# Altium PCB MC0202_V0.90.pcbdoc (part 2 of 3)
Units mm, origin at the board's own origin, x right, y up, seen from the top; angles counter-clockwise.
Board outline 121 x 80 mm, 4 copper layers (Top Layer, Mid-Layer 1, Mid-Layer 2, Bottom Layer); 203 components, 207 nets, 836 pads, 317 vias.
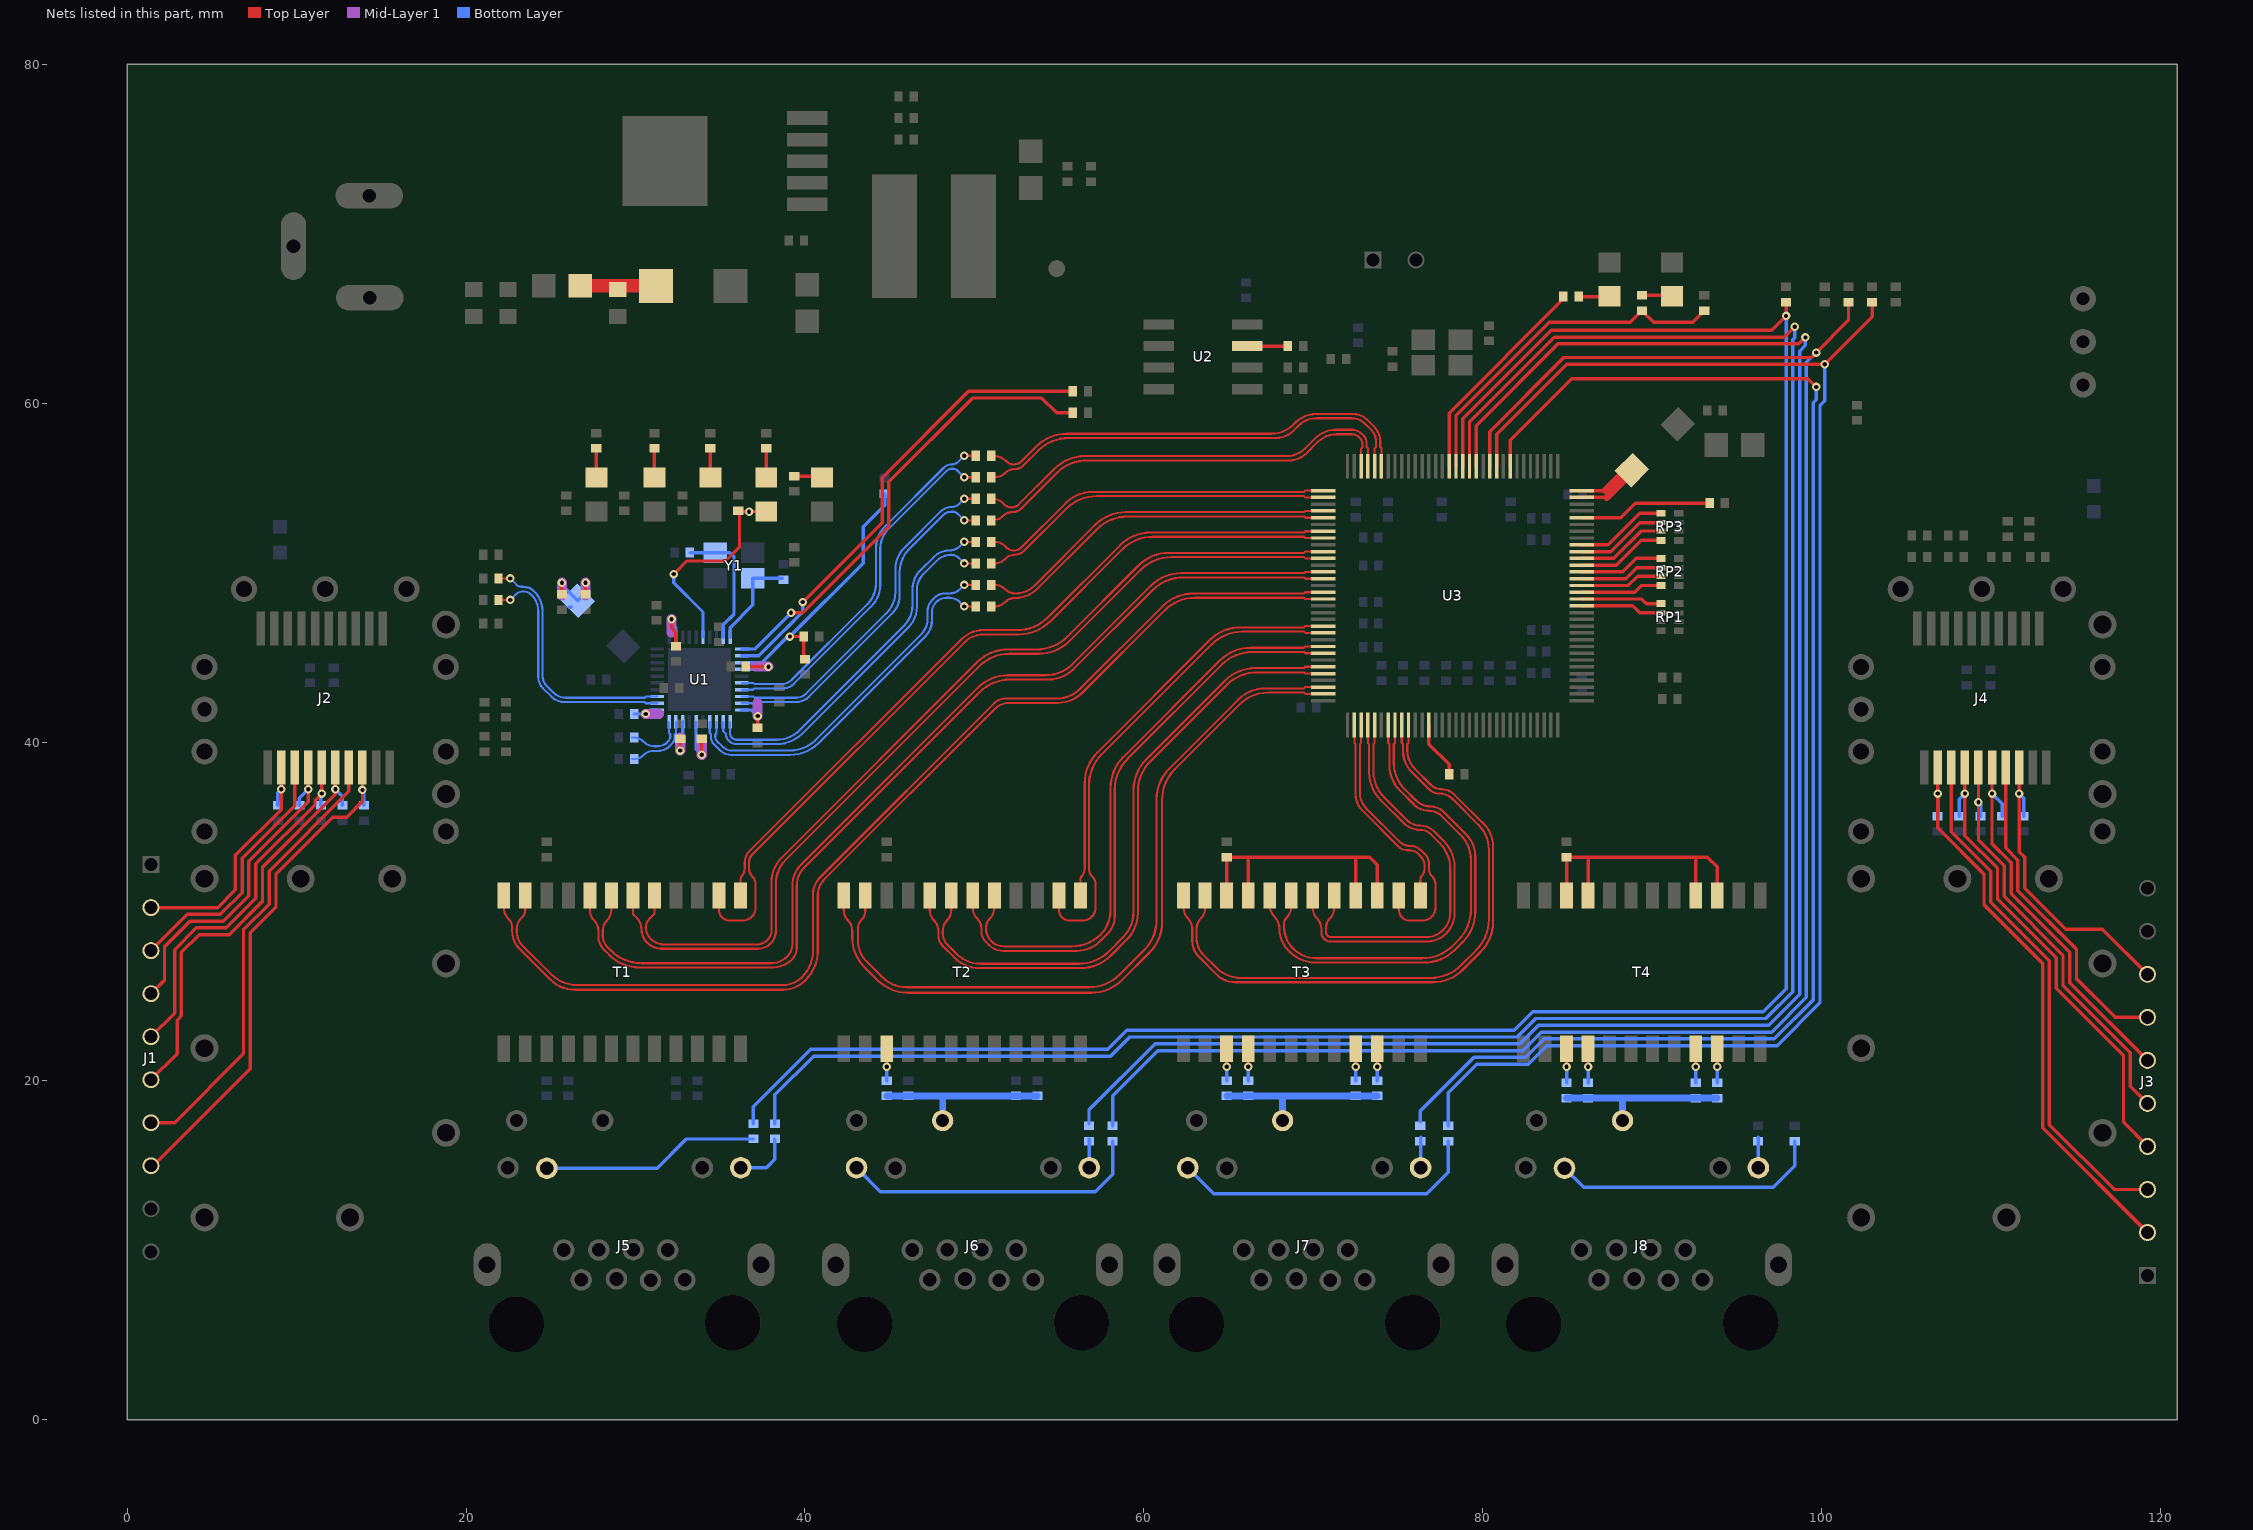
[diagram p4: the nets of this part, all layers, seen from the top]

## Via types
v1: diameter 0.5, hole 0.25, Top Layer to Bottom Layer, 313 vias
v2: diameter 2, hole 1.9, Top Layer to Bottom Layer, 4 vias

## Nets (pads, with @x,y where several pads share a name; then routed paths per layer and width w, separated by ;. In a path a pad name is that pad's centre, name@x,y a point inside that pad or via, vN(x,y) a via of type N, cw(c..) or ccw(c..) an arc to the next point about the centre after c; other vN are vias at no path point) (continued)
N15575: R67.2 T2.15 | length 1.9
  Top Layer w0.2: v1(44.831,20.828) T2.15@44.831,21.891
  Bottom Layer w0.2: R67.2@44.831,20.008 v1(44.831,20.828)
N15683: C69.1 R64.1 R65.1 R66.1 R67.1 | length 10.3
  Bottom Layer w0.4: R67.1@44.831,19.108 48.133,19.108 ; C69.1@48.133,17.653 48.133,19.108 ; R64.1@53.721,19.108 48.133,19.108
N16243: C71.1 T3.3 T3.4 T3.9 T3.10 | length 17.7
  Top Layer w0.2: T3.10@64.897,30.941 C71.1@64.897,33.205 66.167,33.205 ; T3.9@66.167,30.941 66.167,33.205 ; T3.4@72.517,30.941 72.517,33.205 ; T3.3@73.787,30.941 73.787,32.766 73.348,33.205 72.517,33.205 ; 66.167,33.205 72.517,33.205
N16251: R72.2 T3.22 | length 1.9
  Top Layer w0.2: v1(73.787,20.828) T3.22@73.787,21.891
  Bottom Layer w0.2: R72.2@73.787,20.008 v1(73.787,20.828)
N16307: C72.1 T4.3 T4.4 T4.9 T4.10 | length 17.6
  Top Layer w0.2: T4.10@84.963,30.941 C72.1@84.963,33.205 86.233,33.205 ; T4.9@86.233,30.941 86.233,33.205 ; T4.4@92.583,30.941 92.583,33.205 ; T4.3@93.853,30.941 93.853,32.628 93.276,33.205 92.583,33.205 ; 86.233,33.205 92.583,33.205
N16315: R76.2 T4.22 | length 2
  Top Layer w0.2: v1(93.853,20.828) T4.22@93.853,21.891
  Bottom Layer w0.2: R76.2@93.853,19.881 v1(93.853,20.828)
N16467: R73.2 T3.21 | length 1.9
  Top Layer w0.2: v1(72.517,20.828) T3.21@72.517,21.891
  Bottom Layer w0.2: R73.2@72.517,20.008 v1(72.517,20.828)
N16497: R77.2 T4.21 | length 2
  Top Layer w0.2: v1(92.583,20.828) T4.21@92.583,21.891
  Bottom Layer w0.2: R77.2@92.583,19.881 v1(92.583,20.828)
N16623: R74.2 T3.16 | length 1.9
  Top Layer w0.2: v1(66.167,20.828) T3.16@66.167,21.891
  Bottom Layer w0.2: R74.2@66.167,20.008 v1(66.167,20.828)
N16653: R78.2 T4.16 | length 2
  Top Layer w0.2: v1(86.233,20.828) T4.16@86.233,21.891
  Bottom Layer w0.2: R78.2@86.233,19.881 v1(86.233,20.828)
N16787: R75.2 T3.15 | length 1.9
  Top Layer w0.2: v1(64.897,20.828) T3.15@64.897,21.891
  Bottom Layer w0.2: R75.2@64.897,20.008 v1(64.897,20.828)
N16811: R79.2 T4.15 | length 2
  Top Layer w0.2: v1(84.963,20.828) T4.15@84.963,21.891
  Bottom Layer w0.2: R79.2@84.963,19.881 v1(84.963,20.828)
N17015: C73.1 R72.1 R73.1 R74.1 R75.1 | length 10.3
  Bottom Layer w0.4: R75.1@64.897,19.108 68.199,19.108 ; C73.1@68.199,17.653 68.199,19.108 ; R72.1@73.787,19.108 68.199,19.108
N20626: J1.2 J2.2 R46.1 | length 14.8
  Top Layer w0.2: J1.2@1.397,30.226 5.334,30.226 6.382,31.274 6.382,33.306 9.084,36.008 v1(9.084,37.211) J2.2@9.084,38.492
  Bottom Layer w0.2: R46.1@8.89,36.264 8.89,37.017 v1(9.084,37.211)
N20630: J1.3 J2.3 | length 15.5
  Top Layer w0.2: J1.3@1.397,27.686 3.537,29.826 5.5,29.826 6.782,31.108 6.782,33.14 9.884,36.242 J2.3@9.884,38.492
N20636: J1.4 J2.4 R47.1 | length 19.5
  Top Layer w0.2: J1.4@1.397,25.146 2.197,25.946 2.197,27.92 3.703,29.426 5.677,29.426 7.182,30.931 7.182,32.975 10.684,36.477 v1(10.684,37.211) J2.4@10.684,38.492
  Bottom Layer w0.2: R47.1@10.16,36.264 10.16,36.687 v1(10.684,37.211)
N20642: J1.5 J2.5 R48.1 | length 22
  Top Layer w0.2: J1.5@1.397,22.606 2.794,24.003 2.794,27.744 4.076,29.026 5.843,29.026 7.582,30.765 7.582,32.809 11.084,36.311 11.084,36.557 v1(11.484,36.957) J2.5@11.484,38.492
  Bottom Layer w0.2: R48.1@11.43,36.264 11.43,36.903 v1(11.484,36.957) ; v1@11.43,36.957 v1@11.43,37.157
N20648: J1.6 J2.6 R49.1 | length 25.1
  Top Layer w0.2: J1.6@1.397,20.066 2.94,21.609 2.94,23.583 3.194,23.837 3.194,27.578 4.242,28.626 6.008,28.626 7.982,30.6 7.982,32.62 12.284,36.922 v1(12.284,37.211) J2.6@12.284,38.492
  Bottom Layer w0.2: v1(12.284,37.211) 12.7,36.795 R49.1@12.7,36.264
N20654: J1.7 J2.7 | length 26.6
  Top Layer w0.2: J1.7@1.397,17.526 2.794,17.526 6.858,21.59 6.858,28.91 8.382,30.434 8.382,32.385 13.084,37.087 J2.7@13.084,38.492
N20660: J1.8 J2.8 R50.1 | length 30.1
  Top Layer w0.2: J1.8@1.397,14.986 1.524,14.986 7.258,20.72 7.258,28.744 8.782,30.268 8.782,32.219 12.123,35.56 12.954,35.56 13.884,36.49 v1(13.884,37.17) J2.8@13.884,38.492
  Bottom Layer w0.2: R50.1@13.97,36.264 v1@13.97,37.084
N22123: J3.2 J4.2 R51.1 | length 33.9
  Top Layer w0.2: J4.2@106.874,38.492 v1(106.874,36.96) 106.874,34.932 109.601,32.205 109.601,30.388 113.062,26.927 113.062,17.24 J3.2@119.253,11.049
  Bottom Layer w0.2: R51.1@106.861,35.629 106.874,35.642 v1(106.874,36.96)
N22131: J3.4 J4.4 R52.1 | length 28.3
  Top Layer w0.2: J4.4@108.474,38.492 v1(108.474,36.96) 108.474,34.463 110.401,32.536 110.401,30.719 113.862,27.258 113.862,25.469 117.837,21.494 117.837,17.545 J3.4@119.253,16.129
  Bottom Layer w0.2: R52.1@108.131,35.629 108.131,36.617 v1(108.474,36.96)
N22135: J3.5 J4.5 R53.1 | length 24.8
  Top Layer w0.2: J4.5@109.274,38.492 v1(109.274,36.449) 109.274,34.229 110.801,32.702 110.801,30.885 114.262,27.424 114.262,25.634 118.237,21.659 118.237,19.685 J3.5@119.253,18.669
  Bottom Layer w0.2: v1(109.274,36.449) 109.401,36.322 R53.1@109.401,35.629
N22139: J3.6 J4.6 R54.1 | length 22.7
  Top Layer w0.2: J4.6@110.074,38.492 v1(110.074,36.957) 110.074,33.994 111.201,32.867 111.201,31.051 114.662,27.59 114.662,25.8 J3.6@119.253,21.209
  Bottom Layer w0.2: v1(110.074,36.957) 110.671,36.36 R54.1@110.671,35.629
N22147: J3.8 J4.8 R55.1 | length 18
  Top Layer w0.2: J4.8@111.674,38.492 v1(111.674,36.957) 111.674,33.526 112.001,33.199 112.001,31.382 114.427,28.956 116.586,28.956 J3.8@119.253,26.289
  Bottom Layer w0.2: v1(111.674,36.957) 111.941,36.69 R55.1@111.941,35.629
N22159: J3.3 J4.3 | length 31
  Top Layer w0.2: J4.3@107.674,38.492 107.674,34.697 110.001,32.37 110.001,30.554 113.462,27.093 113.462,17.406 117.279,13.589 J3.3@119.253,13.589 J3.3@119.38,13.589
N22191: J3.7 J4.7 | length 19.5
  Top Layer w0.2: J4.7@110.874,38.492 110.874,33.76 111.601,33.033 111.601,31.216 115.062,27.755 115.062,26.035 117.348,23.749 J3.7@119.253,23.749 J3.7@119.38,23.749
N29901: RP1.5 U3.47 | length 4.8
  Top Layer w0.2: U3.47@85.862,48.041 88.853,48.041 89.273,47.621 RP1.5@90.534,47.621
N29903: RP1.7 U3.48 | length 4.8
  Top Layer w0.2: U3.48@85.862,48.441 89.408,48.441 89.678,48.171 RP1.7@90.534,48.171 RP1.7@90.518,48.187
N29949: RP2.1 U3.49 | length 4.8
  Top Layer w0.2: U3.49@85.862,48.841 88.973,48.841 89.37,49.238 RP2.1@90.534,49.238
N29951: RP2.3 U3.50 | length 4.9
  Top Layer w0.2: U3.50@85.862,49.241 88.611,49.241 89.158,49.788 RP2.3@90.534,49.788
N29953: RP2.5 U3.51 | length 4.9
  Top Layer w0.2: U3.51@85.862,49.641 87.122,49.641 88.445,49.641 89.092,50.288 RP2.5@90.534,50.288
N29955: RP2.7 U3.52 | length 5
  Top Layer w0.2: U3.52@85.862,50.041 88.268,50.041 89.065,50.838 RP2.7@90.534,50.838
N30001: RP3.1 U3.53 | length 5.3
  Top Layer w0.2: U3.53@85.862,50.441 87.398,50.441 ; 87.329,50.441 87.398,50.441 ; RP3.1@90.534,51.905 89.37,51.905 87.906,50.441 87.398,50.441
N30003: RP3.3 U3.54 | length 6.6
  Top Layer w0.2: 87.163,50.841 U3.54@85.862,50.841 87.74,50.841 89.354,52.455 RP3.3@90.534,52.455
N30005: RP3.5 U3.55 | length 5.4
  Top Layer w0.2: U3.55@85.862,51.241 87.575,51.241 89.289,52.955 RP3.5@90.534,52.955 RP3.5@90.53,52.959
N30007: RP3.7 U3.56 | length 5.4
  Top Layer w0.2: U3.56@85.862,51.641 87.409,51.641 89.273,53.505 RP3.7@90.534,53.505
N31601: R25.1 U3.60 | length 7.9
  Top Layer w0.2: U3.60@85.862,53.241 88.166,53.241 89.027,54.102 R25.1@93.403,54.102
N31674: L2.1 U3.63 U3.64 | length 7.1
  Top Layer w0.2: U3.63@85.862,54.441 87.334,54.441 ; U3.64@85.862,54.841 87.226,54.841 ; L2.1@88.439,56.054 L2.1@88.82,56.054 L2.1@88.82,55.673
  Top Layer w0.4: 87.226,54.841 L2.1@88.439,56.054 ; 87.334,54.441 L2.1@88.608,55.715
N33611: R16.2 U2.7 | length 2.4
  Top Layer w0.2: U2.7@66.1,63.373 R16.2@68.511,63.373
N33737: R19.1 U3.13 | length 3.4
  Top Layer w0.2: U3.13@76.832,41.011 76.832,39.881 78.036,38.677 R19.1@78.036,38.1
N34627: C74.1 R76.1 R77.1 R78.1 R79.1 | length 10.2
  Bottom Layer w0.4: R79.1@84.963,18.981 88.265,18.981 ; C74.1@88.265,17.653 88.265,18.981 ; R76.1@93.853,18.981 88.265,18.981
N45715: J6.12 R57.2 | length 18.1
  Bottom Layer w0.2: J6.12@43.046,14.872 44.456,13.462 57.15,13.462 58.166,14.478 R57.2@58.166,16.441
N45811: J7.12 R68.2 | length 18.4
  Bottom Layer w0.2: J7.12@62.604,14.872 64.141,13.335 76.708,13.335 77.978,14.605 R68.2@77.978,16.441
N47742: LD6.2 R20.1 | length 1.8
  Top Layer w0.2: R20.1@85.667,66.294 87.487,66.294 LD6.2@87.503,66.31
N47952: LD7.2 R21.1 | length 1.7
  Top Layer w0.2: R21.1@89.408,66.363 LD7.2@91.133,66.363
N048171: LD4.1 R9.2 | length 1.7
  Top Layer w0.2: LD4.1@37.719,55.61 R9.2@37.719,57.335
N48831: J5.11 R56.2 | length 12.9
  Bottom Layer w0.2: J5.11@24.768,14.841 31.281,14.841 33.009,16.568 R56.2@36.957,16.568
N48920: J5.9 R58.2 | length 3.4
  Bottom Layer w0.2: J5.9@36.211,14.872 37.732,14.872 38.227,15.367 R58.2@38.227,16.568
N049111: LD3.1 R6.2 | length 1.7
  Top Layer w0.2: LD3.1@34.417,55.61 R6.2@34.417,57.335
N049271: LD2.1 R4.2 | length 1.7
  Top Layer w0.2: LD2.1@31.115,55.61 R4.2@31.115,57.335
N50896: J6.9 R59.2 | length 1.7
  Bottom Layer w0.2: J6.9@56.785,14.872 R59.2@56.785,16.552
N51484: J7.9 R70.2 | length 1.8
  Bottom Layer w0.2: J7.9@76.343,14.872 R70.2@76.343,16.679
N51703: J8.11 R69.2 | length 16
  Bottom Layer w0.2: J8.11@84.839,14.841 85.963,13.716 97.155,13.716 98.425,14.986 R69.2@98.425,16.441
N51790: J8.9 R71.2 | length 1.8
  Bottom Layer w0.2: J8.9@96.282,14.872 R71.2@96.282,16.679
N052690: LD1.1 R1.2 | length 1.7
  Top Layer w0.2: LD1.1@27.686,55.61 R1.2@27.686,57.335
N053670: LD5.1 R12.2 | length 1.6
  Top Layer w0.2: R12.2@39.37,55.695 LD5.1@40.936,55.695
N88350: C82.1 D1.1 FB2.2 | length 4.5
  Top Layer w0.8: FB2.2@26.733,66.929 D1.1@31.201,66.929
P0_1V: C12.1 C13.1 C19.1 C20.1 C21.1 C22.1 C23.1 C24.1 L1.1 U1.6 U1.8 U1.11 U1.22 U1.34 U1.40 | length 25.3
  Top Layer w0.2: C12.1@25.654,48.71 v1(25.654,49.403) ; C13.1@27.051,48.71 v1(27.051,49.403) ; v1(32.131,47.244) 32.131,46.736 32.385,46.482 C22.1@32.385,45.662 ; v1(32.639,39.497) C20.1@32.639,40.19 ; v1(33.909,39.243) C19.1@33.909,40.19 ; C23.1@36.518,44.45 v1(37.846,44.45) ; C24.1@37.211,40.963 v1(37.211,41.529)
  Mid-Layer 1 w0.2: 25.654,48.768 v1(25.654,49.403)
  Mid-Layer 1 w0.6: 25.654,48.641 v1(25.654,49.403) ; 27.051,48.641 v1(27.051,49.403) ; v1(30.607,41.656) 31.369,41.656 ; 32.131,46.482 v1(32.131,47.244) ; v1(32.639,39.497) 32.639,40.259 ; v1(33.909,39.243) 33.909,40.005 ; 37.084,44.45 v1(37.846,44.45) ; v1(37.211,41.529) 37.211,42.291
  Bottom Layer w0.18: 33.582,39.57 U1.6@33.582,41.189
  Bottom Layer w0.2: v1(25.654,49.403) 25.654,49.276 L1.1@26.59,48.34 27.051,48.801 v1(27.051,49.403) ; L1.1@26.082,47.959 L1.1@26.209,47.959 ; C21.1@29.914,41.656 v1(30.607,41.656) 30.839,41.888 U1.11@31.283,41.888 ; v1(32.131,47.244) 32.131,46.99 32.382,46.739 U1.22@32.382,46.187 ; v1(32.639,39.497) 32.672,39.53 32.672,40.186 32.782,40.296 U1.8@32.782,41.189 ; 33.582,39.57 v1(33.909,39.243) ; U1.40@36.281,41.888 36.852,41.888 v1(37.211,41.529) ; U1.34@36.281,44.288 37.684,44.288 v1(37.846,44.45)
P0_AN: C6.1 U1.37 | length 21.3
  Top Layer w0.127: v1(49.403,55.626) C6.1@50.096,55.626
  Bottom Layer w0.127: U1.37@36.281,43.088 36.935,43.088 37.008,43.161 38.689,43.161 ccw(c38.689,44.093) 39.348,43.434 43.92,48.006 ; 43.921,48.007 ccw(c42.641,49.285) 44.45,49.285 44.45,51.435 cw(c46.036,51.435) 44.914,52.556 ; 44.914,52.556 48.35,55.992 cw(c48.694,55.648) 48.694,56.134 cw(c48.694,55.648) 49.037,55.992 v1(49.403,55.626)
P0_AP: C3.1 U1.36 | length 21.3
  Top Layer w0.127: v1(49.403,56.896) C3.1@50.096,56.896
  Bottom Layer w0.127: U1.36@36.281,43.488 36.96,43.488 37.033,43.415 38.584,43.415 ccw(c38.584,44.347) 39.243,43.688 43.688,48.133 ; 43.689,48.134 ccw(c42.462,49.359) 44.196,49.359 44.196,51.435 cw(c46.036,51.435) 44.735,52.736 48.207,56.208 cw(c48.641,55.775) 48.641,56.388 ccw(c48.641,57.001) 49.075,56.568 v1(49.403,56.896)
P0_BN: C4.1 U1.39 | length 20.1
  Top Layer w0.127: v1(49.403,53.086) C4.1@50.096,53.086
  Bottom Layer w0.127: U1.39@36.281,42.288 36.935,42.288 37.008,42.361 39.497,42.361 ccw(c39.497,43.397) 40.229,42.664 45.159,47.594 ccw(c44.113,48.641) 45.593,48.641 45.593,50.038 cw(c47.485,50.038) 46.146,51.375 ; 46.147,51.376 48.178,53.407 cw(c48.63,52.954) 48.63,53.594 48.715,53.594 cw(c48.715,53.16) 49.022,53.467 v1(49.403,53.086)
P0_BP: C7.1 U1.38 | length 20.1
  Top Layer w0.127: v1(49.403,54.356) C7.1@50.096,54.356
  Bottom Layer w0.127: U1.38@36.281,42.688 36.96,42.688 37.033,42.615 39.497,42.615 ccw(c39.497,43.397) 40.05,42.844 44.831,47.625 ccw(c43.605,48.851) 45.339,48.851 45.339,50.165 cw(c47.179,50.165) 45.878,51.466 48.026,53.614 cw(c48.641,53) 48.451,53.848 cw(c48.641,53) 48.641,53.869 ccw(c48.641,54.533) 49.11,54.063 v1(49.403,54.356)
P0_CN: C9.1 U1.2 | length 21.7
  Top Layer w0.127: v1(49.403,50.546) C9.1@50.096,50.546
  Bottom Layer w0.127: U1.2@35.182,41.189 35.182,40.637 35.328,40.491 ccw(c35.889,40.491) 35.492,40.095 ; 35.492,40.094 35.544,40.042 ; 35.546,40.041 ccw(c35.941,40.439) 35.941,39.878 38.354,39.878 ccw(c38.354,41.972) 39.834,40.491 46.101,46.758 ccw(c44.875,47.984) 46.609,47.984 46.609,48.991 cw(c47.91,48.991) 46.99,49.911 47.774,50.695 ; 47.774,50.695 cw(c48.641,49.828) 48.641,51.054 cw(c48.641,50.441) 49.075,50.874 v1(49.403,50.546)
P0_CP: C8.1 U1.1 | length 21.3
  Top Layer w0.127: v1(49.403,51.816) C8.1@50.096,51.816
  Bottom Layer w0.127: U1.1@35.582,41.189 35.582,40.513 ccw(c35.942,40.513) 35.688,40.258 ccw(c35.993,40.563) 35.993,40.132 38.354,40.132 ccw(c38.354,41.972) 39.655,40.671 45.847,46.863 ccw(c44.621,48.089) 46.355,48.089 46.355,49.042 cw(c47.858,49.042) 46.633,49.914 cw(c47.858,49.042) 46.795,50.105 47.634,50.943 cw(c48.514,50.063) 47.809,51.089 cw(c48.514,50.063) 48.514,51.308 ccw(c48.514,52.228) 49.164,51.577 v1(49.403,51.816)
P0_DN: C11.1 U1.4 | length 21.7
  Top Layer w0.127: v1(49.403,48.006) C11.1@50.096,48.006
  Bottom Layer w0.127: U1.4@34.382,41.189 34.382,40.535 34.455,40.462 34.455,40.259 ccw(c34.964,40.259) 34.604,39.899 35.006,39.497 ccw(c35.619,40.11) 35.619,39.243 39.116,39.243 ccw(c39.116,41.643) 40.813,39.946 ; 40.813,39.946 47.117,46.25 ccw(c46.197,47.17) 47.498,47.17 47.498,47.647 cw(c48.365,47.647) 47.751,48.259 cw(c48.365,47.647) 48.365,48.514 48.536,48.514 cw(c48.536,47.647) 49.148,48.261 v1(49.403,48.006)
P0_DP: C10.1 U1.3 | length 21.3
  Top Layer w0.127: v1(49.403,49.276) C10.1@50.096,49.276
  Bottom Layer w0.127: U1.3@34.782,41.189 34.782,40.51 34.709,40.437 34.709,40.295 ccw(c35.051,40.295) 34.809,40.053 35.111,39.751 ccw(c35.724,40.364) 35.113,39.75 ccw(c35.724,40.364) 35.724,39.497 39.116,39.497 ccw(c39.116,41.643) 40.633,40.125 ; 40.634,40.126 46.863,46.355 ccw(c45.943,47.275) 47.244,47.275 47.244,47.752 cw(c48.111,47.752) 47.497,48.365 ; 47.498,48.365 47.647,48.514 ; 47.647,48.515 cw(c48.26,47.901) 48.26,48.768 48.536,48.768 ccw(c48.536,49.635) 49.148,49.021 v1(49.403,49.276)
P0_HSIN: C65.2 U1.13 | length 14.9
  Top Layer w0.127: C65.2@21.913,49.657 v1(22.606,49.657)
  Bottom Layer w0.127: v1(22.606,49.657) 22.987,49.276 ccw(c23.243,49.532) 23.243,49.17 cw(c23.243,47.928) 23.47,49.149 cw(c23.243,47.928) 23.533,49.136 cw(c23.533,48.582) 23.924,48.974 24.062,48.836 cw(c22.978,47.752) 24.511,47.752 24.511,43.92 ccw(c25.378,43.92) 24.764,43.308 25.146,42.926 ccw(c25.897,43.677) 25.897,42.615 30.556,42.615 30.629,42.688 U1.13@31.283,42.688
P0_HSIP: C63.2 U1.12 | length 14.9
  Top Layer w0.127: C63.2@21.913,48.387 v1(22.606,48.387)
  Bottom Layer w0.127: v1(22.606,48.387) 22.927,48.708 cw(c23.379,48.255) 23.379,48.895 cw(c23.379,48.255) 23.831,48.708 ; 23.831,48.708 23.882,48.656 cw(c22.978,47.752) 23.884,48.655 cw(c22.978,47.752) 24.257,47.752 24.257,43.846 ccw(c25.199,43.846) 24.533,43.18 25.048,42.665 ccw(c25.781,43.397) 25.781,42.361 30.531,42.361 30.604,42.288 U1.12@31.283,42.288
P0_HSON: C59.2 U1.9 | length 4
  Bottom Layer w0.127: C59.2@29.787,38.989 C59.2@29.914,38.989 ccw(c29.914,39.742) 30.446,39.209 cw(c31.09,38.566) 31.09,39.476 31.34,39.476 ccw(c31.34,40.415) 31.537,39.497 ccw(c31.34,40.415) 32.004,39.751 32.174,39.921 ccw(c31.849,40.246) 32.309,40.246 32.309,40.437 32.382,40.51 U1.9@32.382,41.189
P0_HSOP: C61.2 U1.10 | length 3.6
  Bottom Layer w0.127: C61.2@29.787,40.259 C61.2@29.914,40.259 cw(c29.914,39.506) 30.446,40.039 ccw(c31.14,40.732) 31.14,39.751 31.316,39.751 ccw(c31.316,40.544) 31.877,39.983 31.948,40.055 ; 31.949,40.055 ccw(c31.692,40.312) 32.055,40.312 32.055,40.462 31.982,40.535 U1.10@31.982,41.189
P0_LED0: R20.2 U3.81 | length 12.8
  Top Layer w0.2: U3.81@78.032,56.271 78.032,58.801 78.032,59.421 84.767,66.156 R20.2@84.767,66.294
P0_LED1: R21.2 R22.1 U3.80 | length 20.8
  Top Layer w0.2: U3.80@78.432,56.271 78.432,59.255 83.947,64.77 88.715,64.77 R21.2@89.408,65.463 90.101,64.77 92.398,64.77 R22.1@93.091,65.463
P0_MDI_AN: C6.2 U3.92 | length 26
  Top Layer w0.127: C6.2@50.996,55.626 51.203,55.626 ccw(c51.203,56.493) 51.815,55.879 cw(c52.379,55.317) 52.379,56.113 ccw(c52.379,56.85) 52.553,56.134 ccw(c52.379,56.85) 52.9,56.329 ; 52.9,56.329 53.774,57.203 cw(c55.57,55.407) 55.57,57.947 67.807,57.947 ccw(c67.807,59.4) 68.833,58.372 ; 68.834,58.372 69.136,58.674 cw(c70.193,57.617) 70.193,59.112 72.296,59.112 cw(c72.296,58.05) 73.046,58.802 73.452,58.396 ; 73.452,58.395 cw(c72.841,57.785) 73.705,57.785 73.705,57.404 73.632,57.331 U3.92@73.632,56.271
P0_MDI_AP: C3.2 U3.91 | length 26.4
  Top Layer w0.127: C3.2@50.996,56.896 51.108,56.896 cw(c51.108,55.801) 51.883,56.575 ccw(c52.335,57.028) 52.335,56.388 ccw(c52.335,57.028) 52.787,56.575 ; 52.787,56.575 53.669,57.457 cw(c55.465,55.661) 55.465,58.201 67.553,58.201 ccw(c67.553,60.013) 68.834,58.732 68.961,58.859 cw(c70.186,57.634) 70.186,59.366 72.39,59.366 cw(c72.39,58.277) 73.159,59.048 73.632,58.575 cw(c72.841,57.785) 73.959,57.785 73.959,57.416 74.032,57.343 U3.91@74.032,56.271
P0_MDI_BN: C4.2 U3.94 | length 25.3
  Top Layer w0.127: C4.2@50.996,53.086 51.076,53.086 ccw(c51.076,53.953) 51.688,53.339 cw(c52.252,52.777) 52.252,53.573 ccw(c52.252,54.31) 52.426,53.594 ccw(c52.252,54.31) 52.773,53.789 ; 52.773,53.789 54.865,55.881 cw(c56.661,54.084) 56.661,56.624 68.597,56.624 ccw(c68.597,58.022) 69.585,57.034 70.253,57.702 ; 70.253,57.702 cw(c71.374,56.58) 71.374,58.166 72.28,58.166 cw(c72.28,57.541) 72.722,57.983 72.765,57.94 ; 72.765,57.94 cw(c72.427,57.602) 72.905,57.602 72.905,57.404 72.832,57.331 U3.94@72.832,56.271
P0_MDI_BP: C7.2 U3.93 | length 25.8
  Top Layer w0.127: C7.2@50.996,54.356 51.076,54.356 cw(c51.076,53.489) 51.688,54.103 51.763,54.028 ccw(c52.197,54.461) 52.197,53.848 ccw(c52.197,54.461) 52.631,54.028 54.738,56.135 cw(c56.534,54.338) 56.534,56.878 68.453,56.878 ccw(c68.453,58.369) 69.507,57.315 70.1,57.908 cw(c71.374,56.635) 71.135,58.42 cw(c71.374,56.635) 71.374,58.436 72.258,58.436 cw(c72.258,57.542) 72.426,58.42 cw(c72.258,57.542) 72.89,58.174 72.984,58.08 cw(c72.563,57.658) 73.159,57.658 73.159,57.416 73.232,57.343 U3.93@73.232,56.271
P0_MDI_CN: C9.2 U3.98 | length 21
  Top Layer w0.127: C9.2@50.996,50.546 51.203,50.546 ccw(c51.203,51.413) 51.815,50.799 ; 51.852,50.836 cw(c52.379,50.309) 52.379,51.054 ccw(c52.379,51.842) 52.935,51.284 ; 52.936,51.285 55.421,53.77 cw(c57.217,51.974) 57.217,54.514 69.469,54.514 69.542,54.441 U3.98@70.602,54.441
P0_MDI_CP: C8.2 U3.97 | length 21.1
  Top Layer w0.127: C8.2@50.996,51.816 51.203,51.816 cw(c51.203,50.949) 51.815,51.563 51.883,51.495 ccw(c52.335,51.948) 52.335,51.308 ccw(c52.335,51.948) 52.787,51.495 ; 52.787,51.495 55.394,54.102 ; 55.394,54.103 cw(c57.002,52.494) 57.002,54.768 69.457,54.768 69.53,54.841 U3.97@70.602,54.841
P0_MDI_DN: C11.2 U3.101 | length 21.6
  Top Layer w0.127: C11.2@50.996,48.006 51.203,48.006 ccw(c51.203,48.873) 51.815,48.259 cw(c52.391,47.685) 52.391,48.498 52.404,48.498 ccw(c52.404,50.361) 52.646,48.514 ccw(c52.404,50.361) 53.721,49.043 57.247,52.57 cw(c59.043,50.774) 59.043,53.314 69.469,53.314 69.542,53.241 U3.101@70.602,53.241
P0_MDI_DP: C10.2 U3.100 | length 21.6
  Top Layer w0.127: C10.2@50.996,49.276 51.203,49.276 cw(c51.203,48.409) 51.815,49.023 ccw(c52.429,49.635) 52.429,48.768 ccw(c52.429,50.354) 53.55,49.232 ; 53.55,49.232 57.142,52.824 cw(c58.938,51.028) 58.938,53.568 69.457,53.568 69.53,53.641 U3.100@70.602,53.641
P0_RST: C2.1 R5.2 R15.1 U1.33 | length 16.2
  Top Layer w0.2: v1(39.116,46.228) C2.1@39.809,46.228 ; R5.2@39.936,44.9 C2.1@39.936,46.228
  Bottom Layer w0.2: U1.33@36.281,44.688 37.448,44.688 38.988,46.228 v1(39.116,46.228) 43.434,50.546 43.434,52.705 44.704,53.975 R15.1@44.704,54.668
P0_SCL: R84.1 U1.32 | length 28.1
  Top Layer w0.2: v1(39.878,48.26) 44.558,52.94 44.558,55.608 49.656,60.706 R84.1@55.811,60.706 R84.1@55.703,60.598
  Bottom Layer w0.2: U1.32@36.281,45.088 37.282,45.088 38.822,46.628 38.826,46.628 39.878,47.68 v1(39.878,48.26)
P0_SDA: R83.1 U1.31 | length 27.6
  Top Layer w0.2: v1(39.187,47.625) 39.879,47.625 44.958,52.704 44.958,55.372 49.892,60.306 53.994,60.306 54.864,59.436 R83.1@55.811,59.436
  Bottom Layer w0.2: U1.31@36.281,45.488 37.05,45.488 v1(39.187,47.625)
P0_XTAL_I: C1.1 U1.30 Y1.1 | length 5.8
  Bottom Layer w0.2: U1.30@35.582,46.187 35.582,46.758 36.914,48.09 Y1.1@36.914,49.669 C1.1@38.654,49.669
P0_XTAL_O: C5.1 U1.29 Y1.3 | length 7.7
  Bottom Layer w0.2: C5.1@33.216,51.181 Y1.3@34.702,51.181 ; Y1.3@34.714,51.169 35.572,51.169 35.814,50.927 35.814,47.556 35.182,46.924 U1.29@35.182,46.187
P1_ETH_AN: T1.2 U3.104 | length 48.3
  Top Layer w0.127: T1.2@34.925,30.941 34.925,30.099 ccw(c35.56,30.099) 35.052,29.718 ccw(c35.56,30.099) 35.179,29.591 ccw(c35.56,30.099) 35.56,29.464 36.326,29.464 ccw(c36.326,30.226) 36.647,29.535 ccw(c36.326,30.226) 37.017,29.905 ccw(c36.326,30.226) 37.088,30.226 37.088,31.601 ccw(c36.431,31.601) 36.896,32.065 cw(c37.36,32.53) 36.703,32.53 36.703,32.893 cw(c37.369,32.893) 36.898,33.364 ; 36.898,33.364 49.403,45.869 ; 49.404,45.869 cw(c50.577,44.695) 50.577,46.355 52.647,46.355 ccw(c52.647,48.895) 54.443,47.099 ; 54.454,47.088 58.736,51.37 cw(c60.532,49.574) 60.532,52.114 69.469,52.114 69.542,52.041 U3.104@70.602,52.041
P1_ETH_AP: T1.1 U3.103 | length 44.1
  Top Layer w0.127: T1.1@36.195,30.941 36.195,31.814 cw(c36.789,31.814) 36.246,32.056 ccw(c35.758,32.545) 36.382,32.248 ccw(c35.758,32.545) 36.449,32.545 36.449,32.893 cw(c37.369,32.893) 36.54,33.291 cw(c37.369,32.893) 36.718,33.543 49.245,46.07 cw(c50.546,44.769) 50.546,46.609 52.542,46.609 ccw(c52.542,49.149) 54.338,47.353 58.609,51.624 cw(c60.405,49.828) 60.405,52.368 69.457,52.368 69.53,52.441 U3.103@70.602,52.441
P1_ETH_BN: T1.6 U3.107 | length 54.5
  Top Layer w0.127: T1.6@29.845,30.941 29.845,29.845 30.099,29.591 cw(c29.544,29.036) 30.329,29.036 ; 30.353,29.036 30.353,28.956 ccw(c31.479,28.956) 30.683,28.16 ccw(c31.566,29.043) 31.423,27.802 ccw(c31.566,29.043) 31.566,27.794 37.222,27.794 ccw(c37.222,28.86) 37.803,27.966 ccw(c37.222,28.86) 37.976,28.106 ccw(c37.222,28.86) 38.116,28.279 ccw(c37.222,28.86) 38.288,28.86 38.288,31.658 cw(c40.248,31.658) 38.862,33.043 50.287,44.468 cw(c52.083,42.672) 52.083,45.212 53.812,45.212 ccw(c53.812,47.752) 55.608,45.956 59.822,50.17 cw(c61.618,48.374) 61.618,50.914 69.469,50.914 69.542,50.841 U3.107@70.602,50.841
P1_ETH_BP: T1.5 U3.106 | length 54.1
  Top Layer w0.127: 30.607,29.087 30.607,29.083 ccw(c31.584,29.083) 30.893,28.392 ccw(c31.724,29.223) 31.724,28.048 37.139,28.048 ccw(c37.139,28.98) 37.798,28.321 ccw(c37.23,28.89) 38.034,28.89 38.034,31.763 cw(c39.994,31.763) 38.608,33.148 50.182,44.722 cw(c51.978,42.926) 51.978,45.466 53.685,45.466 ccw(c53.685,48.006) 55.481,46.21 59.695,50.424 cw(c61.491,48.628) 61.491,51.168 69.457,51.168 69.53,51.241 U3.106@70.602,51.241 ; 30.611,29.087 cw(c31.224,29.087) 30.791,29.521 31.115,29.845 T1.5@31.115,30.941
P1_ETH_CN: T1.8 U3.110 | length 58
  Top Layer w0.127: T1.8@27.305,30.941 27.305,30.078 ccw(c28.174,30.078) 27.559,29.464 cw(c26.946,28.851) 27.813,28.851 27.813,28.514 ccw(c28.893,28.514) 28.129,27.751 28.446,27.434 ccw(c30.242,29.23) 30.242,26.69 38.066,26.69 ccw(c38.066,28.355) 38.177,26.694 ccw(c38.066,28.355) 39.243,27.178 ccw(c38.588,27.833) 39.515,27.833 39.515,31.496 cw(c41.09,31.496) 39.976,32.61 40.132,32.766 50.31,42.944 cw(c52.106,41.148) 52.106,43.688 54.356,43.688 ccw(c54.356,45.834) 55.873,44.316 ; 55.874,44.317 60.527,48.97 cw(c62.323,47.174) 62.323,49.714 69.469,49.714 69.542,49.641 U3.110@70.602,49.641
P1_ETH_CP: T1.7 U3.109 | length 57.6
  Top Layer w0.127: T1.7@28.575,30.941 28.575,30.097 cw(c27.66,30.097) 28.307,29.45 ccw(c28.886,28.871) 28.067,28.871 28.067,28.531 ccw(c28.934,28.531) 28.32,27.919 28.551,27.688 ccw(c30.347,29.484) 30.046,26.962 ccw(c30.347,29.484) 30.347,26.944 38.008,26.944 ccw(c38.008,28.286) 38.957,27.337 ccw(c38.223,28.071) 39.261,28.071 39.261,31.496 cw(c41.09,31.496) 39.796,32.789 40.132,33.125 50.205,43.198 cw(c52.001,41.402) 52.001,43.942 54.229,43.942 ccw(c54.229,46.141) 55.784,44.586 60.422,49.224 cw(c62.218,47.428) 62.218,49.968 69.457,49.968 69.53,50.041 U3.109@70.602,50.041
P1_ETH_DN: T1.12 U3.113 | length 63.7
  Top Layer w0.127: T1.12@22.225,30.941 22.225,30.266 ccw(c23.242,30.266) 22.523,29.547 cw(c22.047,29.071) 22.72,29.071 22.72,28.86 ccw(c24.244,28.86) 23.167,27.782 23.39,27.559 24.971,25.977 ; 24.972,25.976 ccw(c26.411,27.417) 26.411,25.381 38.733,25.381 ccw(c38.733,27.18) 40.005,25.908 40.023,25.926 ccw(c38.227,27.722) 40.748,27.413 ccw(c38.227,27.722) 40.756,27.485 40.756,30.952 cw(c42.095,30.952) 40.767,31.124 cw(c42.095,30.952) 41.148,31.899 51.203,41.954 cw(c52.07,41.086) 52.07,42.313 54.908,42.313 ccw(c54.908,44.406) 56.388,42.926 61.232,47.77 cw(c63.028,45.974) 63.028,48.514 69.469,48.514 69.542,48.441 U3.113@70.602,48.441
P1_ETH_DP: T1.11 U3.112 | length 63.4
  Top Layer w0.127: 22.987,28.987 22.987,28.829 ccw(c24.213,28.829) 23.346,27.962 25.019,26.289 ccw(c26.552,27.822) 25.02,26.288 ccw(c26.552,27.822) 26.552,25.654 38.703,25.654 ccw(c38.703,27.247) 39.829,26.12 ccw(c38.261,27.688) 40.471,27.517 ccw(c38.261,27.688) 40.478,27.688 40.478,30.999 cw(c41.899,30.999) 40.491,31.192 cw(c41.899,30.999) 40.513,31.313 cw(c41.899,30.999) 40.894,32.004 51.207,42.317 cw(c51.814,41.71) 51.76,42.567 ; 22.991,28.987 cw(c23.845,28.987) 23.241,29.591 23.315,29.665 ccw(c22.882,30.099) 23.495,30.099 T1.11@23.495,30.941 ; 51.814,42.569 ccw(c51.814,41.71) 51.76,42.567 ; U3.112@70.602,48.841 69.53,48.841 69.457,48.768 62.923,48.768 ccw(c62.923,46.228) 61.127,48.024 56.239,43.136 cw(c54.864,44.512) 54.864,42.567 51.76,42.567
P1_LED0: R23.1 R56.1 U3.79 | length 129.8
  Top Layer w0.2: U3.79@78.832,56.271 78.832,59.078 84.054,64.3 96.558,64.3 97.066,64.3 v1(97.917,65.151) 97.917,65.659 R23.1@97.917,65.971
  Bottom Layer w0.2: R56.1@36.957,17.468 36.957,18.473 40.347,21.863 57.873,21.863 58.997,22.987 81.881,22.987 82.973,24.079 96.562,24.079 97.917,25.434 v1(97.917,65.151)
P1_LED1: R58.1 U3.78 | length 127.8
  Top Layer w0.2: U3.78@79.232,56.271 79.232,58.912 84.22,63.9 97.809,63.9 v1(98.425,64.516)
  Bottom Layer w0.2: R58.1@38.227,17.468 38.227,19.177 40.513,21.463 58.039,21.463 59.163,22.587 82.046,22.587 83.138,23.679 96.727,23.679 98.317,25.269 98.317,63.754 98.425,63.862 v1(98.425,64.516)
P2_ETH_AN: T2.2 U3.118 | length 29.2
  Top Layer w0.127: T2.2@54.991,30.941 54.991,30.099 ccw(c55.626,30.099) 55.118,29.718 ccw(c55.626,30.099) 55.245,29.591 ccw(c55.626,30.099) 55.626,29.464 56.392,29.464 ccw(c56.392,30.226) 56.713,29.535 ccw(c56.392,30.226) 57.083,29.905 ccw(c56.392,30.226) 57.154,30.226 57.154,31.601 ccw(c56.497,31.601) 56.962,32.065 cw(c57.426,32.53) 56.769,32.53 56.769,37.474 cw(c59.309,37.474) 57.513,39.271 64.013,45.77 cw(c65.809,43.974) 65.809,46.514 69.469,46.514 69.542,46.441 U3.118@70.602,46.441
P2_ETH_AP: T2.1 U3.117 | length 25
  Top Layer w0.127: T2.1@56.261,30.941 56.261,31.814 cw(c56.855,31.814) 56.312,32.056 ccw(c55.824,32.545) 56.448,32.248 ccw(c55.824,32.545) 56.515,32.545 56.515,37.58 cw(c59.055,37.58) 57.259,39.376 63.907,46.024 cw(c65.703,44.228) 65.703,46.768 69.457,46.768 69.53,46.841 U3.117@70.602,46.841
P2_ETH_BN: T2.6 U3.121 | length 35.4
  Top Layer w0.127: T2.6@49.911,30.941 49.911,30.204 ccw(c50.778,30.204) 50.164,29.592 cw(c49.552,28.978) 50.419,28.978 50.419,28.829 ccw(c51.286,28.829) 50.673,28.216 50.881,28.007 ccw(c51.689,28.815) 51.689,27.673 56.063,27.673 ccw(c56.063,29.569) 57.404,28.228 57.868,28.693 ccw(c56.843,29.718) 58.293,29.718 58.293,37.198 cw(c60.833,37.198) 59.037,38.994 64.613,44.57 cw(c66.409,42.774) 66.409,45.314 69.469,45.314 69.542,45.241 U3.121@70.602,45.241
P2_ETH_BP: T2.5 U3.120 | length 34.9
  Top Layer w0.127: T2.5@51.181,30.941 51.181,30.204 cw(c50.314,30.204) 50.928,29.592 ccw(c51.49,29.028) 50.694,29.028 50.694,28.973 ccw(c51.706,28.973) 50.991,28.258 ccw(c51.757,29.024) 51.757,27.94 55.76,27.94 ccw(c55.76,30.346) 57.46,28.644 ccw(c55.76,30.346) 57.461,28.645 ; 57.462,28.646 ccw(c56.066,30.04) 58.039,30.04 58.039,37.303 cw(c60.579,37.303) 58.783,39.099 64.508,44.824 cw(c66.304,43.028) 66.304,45.568 69.457,45.568 69.53,45.641 U3.120@70.602,45.641
P2_ETH_CN: T2.8 U3.124 | length 38.3
  Top Layer w0.127: T2.8@47.371,30.941 47.371,30.077 ccw(c48.238,30.077) 47.624,29.465 cw(c47.012,28.851) 47.879,28.851 47.879,28.606 ccw(c48.821,28.606) 48.155,27.94 48.836,27.258 ccw(c50.292,28.714) 50.292,26.655 56.27,26.655 ccw(c56.27,29.195) 58.066,27.399 58.987,28.321 ccw(c57.382,29.926) 59.652,29.926 59.652,37.067 cw(c62.192,37.067) 60.396,38.863 64.903,43.37 cw(c66.699,41.574) 66.699,44.114 69.469,44.114 69.542,44.041 U3.124@70.602,44.041
P2_ETH_CP: T2.7 U3.123 | length 37.9
  Top Layer w0.127: T2.7@48.641,30.941 48.641,30.077 cw(c47.774,30.077) 48.388,29.465 ccw(c49,28.851) 48.133,28.851 48.133,28.702 ccw(c49.053,28.702) 48.402,28.052 48.973,27.481 ccw(c50.352,28.859) 50.352,26.909 56.164,26.909 ccw(c56.164,29.449) 57.96,27.653 58.775,28.468 ccw(c57.271,29.972) 59.398,29.972 59.398,37.172 cw(c61.938,37.172) 60.142,38.968 64.798,43.624 cw(c66.594,41.828) 66.594,44.368 69.457,44.368 69.53,44.441 U3.123@70.602,44.441
P2_ETH_DN: T2.12 U3.127 | length 44.6
  Top Layer w0.127: T2.12@42.291,30.941 42.291,30.077 ccw(c43.158,30.077) 42.544,29.465 cw(c41.932,28.851) 42.799,28.851 42.799,28.448 ccw(c45.252,28.448) 43.517,26.714 44.287,25.944 ccw(c46.083,27.74) 46.083,25.2 56.914,25.2 ccw(c56.914,27.74) 58.71,25.944 60.343,27.577 ccw(c58.547,29.373) 61.087,29.373 61.087,36.598 cw(c63.627,36.598) 61.831,38.394 65.659,42.222 cw(c67.329,40.552) 67.329,42.914 69.469,42.914 69.542,42.841 U3.127@70.602,42.841
P2_ETH_DP: T2.11 U3.126 | length 44
  Top Layer w0.127: T2.11@43.561,30.941 43.561,30.026 cw(c42.818,30.026) 43.344,29.501 ccw(c43.869,28.975) 43.126,28.975 43.126,28.271 ccw(c44.826,28.271) 43.623,27.07 44.577,26.116 ccw(c46,27.539) 44.578,26.115 ccw(c46,27.539) 46,25.527 56.778,25.527 ccw(c56.778,28.067) 58.575,26.271 60.016,27.712 ccw(c58.22,29.509) 60.76,29.509 60.76,36.63 cw(c63.3,36.63) 61.504,38.426 65.583,42.505 cw(c67.183,40.905) 67.183,43.168 69.457,43.168 69.53,43.241 U3.126@70.602,43.241
P2_LED0: R24.1 R57.1 U3.75 | length 110.4
  Top Layer w0.2: U3.75@80.432,56.271 80.432,58.322 84.81,62.7 99.403,62.7 v1(99.695,62.992) 101.6,64.897 R24.1@101.6,65.971
  Bottom Layer w0.2: R57.1@58.166,17.341 58.166,19.119 60.834,21.787 82.378,21.787 83.47,22.879 97.059,22.879 99.117,24.937 99.117,62.414 v1(99.695,62.992)
P2_LED1: R59.1 U3.77 | length 108.5
  Top Layer w0.2: U3.77@79.632,56.271 79.632,58.677 84.455,63.5 98.679,63.5 v1(99.06,63.881)
  Bottom Layer w0.2: R59.1@56.769,17.468 56.769,18.288 60.668,22.187 82.212,22.187 83.304,23.279 96.893,23.279 98.717,25.103 98.717,63.08 99.06,63.423 v1(99.06,63.881)
P3_ETH_AN: T3.2 U3.3 | length 16.7
  Top Layer w0.127: U3.3@72.832,41.011 72.832,39.951 72.759,39.878 72.759,37.024 ccw(c74.111,37.024) 73.155,36.068 75.09,34.133 ccw(c75.737,34.781) 75.737,33.865 cw(c75.737,32.949) 76.385,33.597 76.617,33.365 ; T3.2@75.057,30.941 75.057,30.099 ccw(c75.692,30.099) 75.184,29.718 ccw(c75.692,30.099) 75.311,29.591 ccw(c75.692,30.099) 75.692,29.464 76.458,29.464 ccw(c76.458,30.226) 76.779,29.535 ccw(c76.458,30.226) 77.149,29.905 ccw(c76.458,30.226) 77.22,30.226 77.22,31.601 ccw(c76.563,31.601) 77.028,32.065 cw(c77.492,32.53) 76.835,32.53 76.835,32.839 ccw(c76.091,32.839) 76.617,33.365
P3_ETH_AP: T3.1 U3.2 | length 12.1
  Top Layer w0.127: U3.2@72.432,41.011 72.432,39.939 72.505,39.866 72.505,36.914 ccw(c73.847,36.914) 72.898,35.966 75.032,33.832 ccw(c75.565,34.365) 75.565,33.611 75.692,33.611 cw(c75.692,32.892) 76.2,33.401 ; 76.201,33.4 76.327,33.274 cw(c75.714,32.661) 76.581,32.661 76.581,32.545 cw(c75.89,32.545) 76.514,32.248 cw(c75.89,32.545) 76.378,32.056 ccw(c76.921,31.814) 76.327,31.814 T3.1@76.327,30.941
P3_ETH_BN: T3.6 U3.5 | length 24.8
  Top Layer w0.127: T3.6@69.977,30.941 69.977,30.204 ccw(c70.844,30.204) 70.23,29.592 cw(c69.618,28.978) 70.485,28.978 70.485,28.77 ccw(c71.028,28.77) 70.553,28.507 ccw(c71.028,28.77) 70.644,28.386 ccw(c71.028,28.77) 70.764,28.296 ccw(c71.028,28.77) 71.028,28.228 76.734,28.228 ccw(c76.734,29.797) 77.649,28.521 ccw(c76.734,29.797) 77.844,28.687 ccw(c76.625,29.906) 78.019,28.891 ccw(c76.625,29.906) 78.349,29.906 78.349,32.631 ccw(c76.216,32.631) 77.724,34.14 77.132,34.731 ccw(c76.327,33.926) 76.327,35.065 cw(c76.327,36.205) 75.522,35.398 ; U3.5@73.632,41.011 73.632,39.951 73.559,39.878 73.559,38.291 ccw(c75.805,38.291) 74.216,36.704 ; 74.217,36.703 75.521,35.399
P3_ETH_BP: T3.5 U3.4 | length 24
  Top Layer w0.127: T3.5@71.247,30.941 71.247,30.204 cw(c70.38,30.204) 70.994,29.592 ccw(c71.553,29.031) 70.761,29.031 70.761,28.768 ccw(c71.025,28.768) 70.838,28.581 ccw(c71.078,28.821) 71.078,28.482 76.652,28.482 ccw(c76.652,29.924) 77.672,28.904 ccw(c76.652,29.924) 78.095,29.924 78.095,32.526 ccw(c75.962,32.526) 77.47,34.035 76.953,34.552 ; U3.4@73.232,41.011 73.232,39.939 73.305,39.866 73.305,38.227 ccw(c75.65,38.227) 73.992,36.569 ; 73.992,36.569 75.342,35.219 ; 75.342,35.219 ccw(c76.327,36.205) 76.327,34.811 cw(c76.327,33.926) 76.952,34.552
P3_ETH_CN: T3.8 U3.8 | length 29.8
  Top Layer w0.127: T3.8@67.437,30.941 67.437,30.376 ccw(c68.413,30.376) 67.723,29.686 cw(c67.033,28.996) 68.008,28.996 ccw(c69.864,28.996) 68.37,27.896 ccw(c69.864,28.996) 68.552,27.685 68.62,27.616 ; 68.62,27.616 ccw(c70.154,29.151) 70.154,26.981 76.556,26.981 ccw(c76.556,29.521) 78.352,27.725 78.844,28.217 ccw(c77.086,29.975) 79.572,29.975 79.572,33.26 ccw(c77.756,33.26) 79.04,34.544 77.691,35.893 ; U3.8@74.832,41.011 74.832,39.951 74.759,39.878 74.759,38.764 ccw(c76.947,38.764) 75.4,37.217 76.041,36.576 ccw(c76.961,37.496) 76.961,36.195 ; 76.962,36.195 cw(c76.962,35.164) 77.691,35.893
P3_ETH_CP: T3.7 U3.7 | length 28.8
  Top Layer w0.127: T3.7@68.707,30.941 68.707,30.268 cw(c67.84,30.268) 68.454,29.655 ccw(c68.862,29.245) 68.283,29.245 68.283,29.09 ccw(c70.089,29.09) 68.812,27.813 ccw(c70.208,29.208) 68.813,27.812 ccw(c70.208,29.208) 70.208,27.235 76.451,27.235 ccw(c76.451,29.775) 78.247,27.979 78.574,28.306 ccw(c76.778,30.102) 79.318,30.102 79.318,33.02 ccw(c77.177,33.02) 78.691,34.534 77.601,35.624 ccw(c76.835,34.857) 76.835,35.941 cw(c76.835,37.192) 75.95,36.307 75.11,37.148 cw(c76.57,38.608) 74.505,38.608 74.505,39.866 74.432,39.939 U3.7@74.432,41.011
P3_ETH_DN: T3.12 U3.10 | length 37.9
  Top Layer w0.127: T3.12@62.357,30.941 62.357,30.204 ccw(c63.224,30.204) 62.61,29.592 cw(c61.998,28.978) 62.865,28.978 62.865,28.243 ccw(c64.132,28.243) 63.114,27.489 ccw(c64.132,28.243) 63.236,27.347 64.313,26.27 ccw(c65.405,27.362) 64.469,26.133 ccw(c65.405,27.362) 65.405,25.817 77.064,25.817 ccw(c77.064,28.295) 78.815,26.543 79.882,27.61 ccw(c78.086,29.406) 80.626,29.406 80.626,33.783 ccw(c78.573,33.783) 80.217,35.013 ; U3.10@75.632,41.011 75.632,39.951 75.559,39.878 75.559,39.497 ccw(c77.078,39.497) 76.004,38.423 76.962,37.465 ccw(c77.575,38.078) 77.575,37.211 cw(c77.575,36.141) 78.332,36.898 80.217,35.013 ; 80.025,35.234 cw(c78.573,33.783) 80.217,35.013
P3_ETH_DP: T3.11 U3.9 | length 36.8
  Top Layer w0.127: T3.11@63.627,30.941 63.627,30.204 cw(c62.76,30.204) 63.374,29.592 ccw(c63.986,28.978) 63.119,28.978 63.119,28.41 ccw(c64.489,28.41) 63.52,27.442 64.292,26.67 ccw(c65.737,28.115) 64.294,26.668 ccw(c65.737,28.115) 65.737,26.071 76.933,26.071 ccw(c76.933,28.611) 78.729,26.815 79.629,27.716 ccw(c77.835,29.51) 80.372,29.51 80.372,33.627 ccw(c78.269,33.627) 79.756,35.114 78.227,36.644 ccw(c77.47,35.887) 77.47,36.957 cw(c77.47,37.877) 76.82,37.226 75.84,38.206 cw(c77.13,39.497) 75.305,39.497 75.305,39.866 75.232,39.939 U3.9@75.232,41.011
P3_LED0: R26.1 R68.1 U3.74 | length 91.7
  Top Layer w0.2: U3.74@80.832,56.271 80.832,57.785 80.832,58.157 84.975,62.3 v1(100.203,62.3) 102.997,65.094 R26.1@102.997,65.971
  Bottom Layer w0.2: R68.1@77.978,17.341 77.978,19.304 79.661,20.987 82.709,20.987 83.801,22.079 97.39,22.079 99.917,24.606 99.917,59.854 100.203,60.14 v1(100.203,62.3)
P3_LED1: R70.1 U3.72 | length 84.1
  Top Layer w0.2: U3.72@81.632,56.271 81.632,57.454 81.632,57.825 85.257,61.45 99.205,61.45 v1(99.695,60.96)
  Bottom Layer w0.2: 76.327,17.595 76.327,18.219 79.495,21.387 82.543,21.387 83.635,22.479 97.224,22.479 99.517,24.772 99.517,60.02 99.695,60.198 v1(99.695,60.96)
P3LED1: LD4.2 R10.2 U1.26 | length 12.7
  Top Layer w0.18: v1(32.258,49.911) 33.029,50.682 35.315,50.682 36.126,51.493 36.126,53.594 v1(36.703,53.594) 36.719,53.61 LD4.2@37.719,53.61
  Bottom Layer w0.18: v1(32.258,49.911) 32.258,49.403 33.982,47.679 U1.26@33.982,46.187